# Altium PCB 606-100870-r02.pcbdoc (part 2 of 2)
Units mm, origin at the board's own origin, x right, y up, seen from the top; angles counter-clockwise.
Board outline 62.5 x 28 mm, 2 copper layers (Top Layer, Bottom Layer), stack 1.471 mm thick; 13 components, 5 nets, 34 pads, 13 vias.
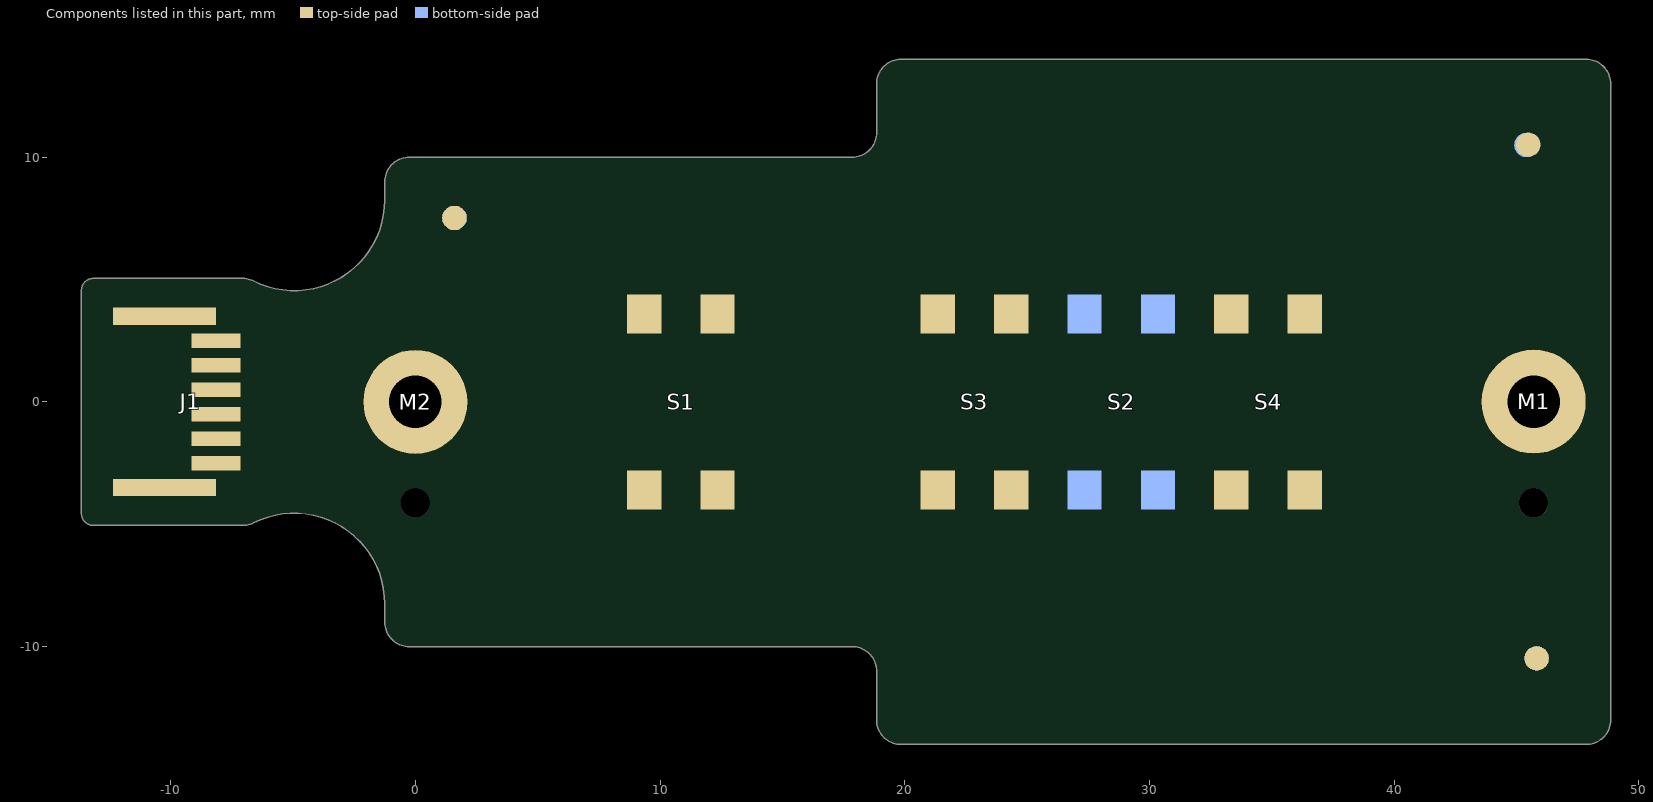
[diagram p2: the components of this part, seen from the top]

## Silkscreen, mask and mechanical layers (free items; w line width, h text height) (continued)
DXF_BOT:
  circle w0.013: c28.85,0 r1.25
  circle w0.013: c0,0 r1.075
  circle w0.013: c0,4.125 r0.6
  circle w0.013: c45.7,4.125 r0.6
  circle w0.013: c45.7,0 r1.075
  circle w0.013: c137.535,62.135 r1.075
  circle w0.013: c137.535,58.01 r0.6
  circle w0.013: c183.235,58.01 r0.6
  circle w0.013: c183.235,62.135 r1.075
  circle w0.013: c154.385,62.135 r1.25
  circle w0.013: c78.129,61.143 r2.25
  circle w0.013: c32.429,57.018 r0.6
  circle w0.013: c78.129,57.018 r0.6
  circle w0.013: c32.429,61.143 r2.25
  circle w0.013: c78.129,61.143 r1.075
  circle w0.013: c32.429,61.143 r1.075
  circle w0.013: c-71.193,56.834 r1.075
  circle w0.013: c-71.193,52.709 r0.6
  circle w0.013: c-25.493,52.709 r0.6
  circle w0.013: c-25.493,56.834 r1.075
  lines w0.013: 29.279,51.143 60.279,51.143 ; 29.279,51.143 29.279,71.143 ; 29.279,51.143 29.279,48.143 ccw(c30.279,48.143) 30.279,47.143 58.279,47.143 ccw(c58.279,48.143) 59.279,48.143 59.279,50.143 cw(c60.279,50.143) 60.279,51.143 ; 29.279,71.143 60.279,71.143 ; 29.279,71.143 29.279,74.143 cw(c30.279,74.143) 30.279,75.143 58.279,75.143 cw(c58.279,74.143) 59.279,74.143 59.279,72.143 ccw(c60.279,72.143) 60.279,71.143 ; 60.279,51.143 78.379,51.143 ccw(c78.379,52.143) 79.379,52.143 79.379,52.893 cw(c83.079,52.893) 84.74,56.2 ccw(c85.189,57.093) 85.189,56.093 91.279,56.093 ccw(c91.279,56.593) 91.779,56.593 91.779,65.693 ccw(c91.279,65.693) 91.279,66.193 85.189,66.193 ccw(c85.189,65.193) 84.74,66.087 cw(c83.079,69.393) 79.379,69.393 79.379,70.143 ccw(c78.379,70.143) 78.379,71.143 60.279,71.143 ; -74.343,43.834 ccw(c-73.343,43.834) -73.343,42.834 -45.343,42.834 ccw(c-45.343,43.834) -44.343,43.834 -44.343,45.834 cw(c-43.343,45.834) -43.343,46.834 -25.243,46.834 ccw(c-25.243,47.834) -24.243,47.834 -24.243,48.584 cw(c-20.543,48.584) -18.882,51.89 ccw(c-18.433,52.784) -18.433,51.784 -12.343,51.784 ccw(c-12.343,52.284) -11.843,52.284 -11.843,61.384 ccw(c-12.343,61.384) -12.343,61.884 -18.433,61.884 ccw(c-18.433,60.884) -18.882,61.778 cw(c-20.543,65.084) -24.243,65.084 -24.243,65.834 ccw(c-25.243,65.834) -25.243,66.834 -43.343,66.834 cw(c-43.343,67.834) -44.343,67.834 -44.343,69.834 ccw(c-45.343,69.834) -45.343,70.834 -73.343,70.834 ccw(c-73.343,69.834) -74.343,69.834 -74.343,43.834 ; -13.65,-4.55 ccw(c-13.15,-4.55) -13.15,-5.05 -7.06,-5.05 ccw(c-7.06,-4.05) -6.611,-4.944 cw(c-4.95,-8.25) -1.25,-8.25 -1.25,-9 ccw(c-0.25,-9) -0.25,-10 17.85,-10 cw(c17.85,-11) 18.85,-11 18.85,-13 ccw(c19.85,-13) 19.85,-14 47.85,-14 ccw(c47.85,-13) 48.85,-13 48.85,13 ccw(c47.85,13) 47.85,14 19.85,14 ccw(c19.85,13) 18.85,13 18.85,11 cw(c17.85,11) 17.85,10 -0.25,10 ccw(c-0.25,9) -1.25,9 -1.25,8.25 cw(c-4.95,8.25) -6.611,4.944 ccw(c-7.06,4.05) -7.06,5.05 -13.15,5.05 ccw(c-13.15,4.55) -13.65,4.55 -13.65,-4.55 ; 26.6,-2.25 31.1,-2.25 31.1,2.25 26.6,2.25 26.6,-2.25 ; 134.385,49.135 ccw(c135.385,49.135) 135.385,48.135 163.385,48.135 ccw(c163.385,49.135) 164.385,49.135 164.385,51.135 cw(c165.385,51.135) 165.385,52.135 183.485,52.135 ccw(c183.485,53.135) 184.485,53.135 184.485,53.885 cw(c188.185,53.885) 189.846,57.191 ccw(c190.295,58.085) 190.295,57.085 196.385,57.085 ccw(c196.385,57.585) 196.885,57.585 196.885,66.685 ccw(c196.385,66.685) 196.385,67.185 190.295,67.185 ccw(c190.295,66.185) 189.846,67.079 cw(c188.185,70.385) 184.485,70.385 184.485,71.135 ccw(c183.485,71.135) 183.485,72.135 165.385,72.135 cw(c165.385,73.135) 164.385,73.135 164.385,75.135 ccw(c163.385,75.135) 163.385,76.135 135.385,76.135 ccw(c135.385,75.135) 134.385,75.135 134.385,49.135 ; 152.135,59.885 152.135,64.385 156.635,64.385 156.635,59.885 152.135,59.885
  text "SECONDARY" at -125.28,54.713 h3.17
DXF_JULY21_TOP:
  drawing of 175 lines, arcs and shapes, not listed
  text "BOARD OUTLINE" at 5.94,273.873 h3.17
  text "KEEP WITHIN/KEEP OUT" at 101.064,273.873 h3.17
  text "COMPONENT PLACEMENT" at 204.36,273.873 h3.17
  text "PRIMARY" at -57.046,229.545 h3.17
DXF_JULY21_BOT:
  circle w0.013: c41.907,169.834 r1.075
  circle w0.013: c41.907,165.709 r0.6
  circle w0.013: c-3.793,165.709 r0.6
  circle w0.013: c-3.793,169.834 r1.075
  circle w0.013: c99.829,174.143 r1.075
  circle w0.013: c145.529,174.143 r1.075
  circle w0.013: c99.829,174.143 r2.25
  circle w0.013: c145.529,170.018 r0.6
  circle w0.013: c99.829,170.018 r0.6
  circle w0.013: c145.529,174.143 r2.25
  circle w0.013: c221.785,175.135 r1.25
  circle w0.013: c250.635,175.135 r1.075
  circle w0.013: c250.635,171.01 r0.6
  circle w0.013: c204.935,171.01 r0.6
  circle w0.013: c204.935,175.135 r1.075
  circle w0.013: c45.7,0 r1.075
  circle w0.013: c45.7,4.125 r0.6
  circle w0.013: c0,4.125 r0.6
  circle w0.013: c0,0 r1.075
  circle w0.013: c28.85,0 r1.25
  lines w0.013: 96.679,164.143 96.679,161.143 ccw(c97.679,161.143) 97.679,160.143 125.679,160.143 ccw(c125.679,161.143) 126.679,161.143 126.679,163.143 cw(c127.679,163.143) 127.679,164.143 ; 96.679,164.143 96.679,184.143 ; 96.679,164.143 127.679,164.143 ; 96.679,184.143 96.679,187.143 cw(c97.679,187.143) 97.679,188.143 125.679,188.143 cw(c125.679,187.143) 126.679,187.143 126.679,185.143 ccw(c127.679,185.143) 127.679,184.143 ; 96.679,184.143 127.679,184.143 ; 127.679,164.143 145.779,164.143 ccw(c145.779,165.143) 146.779,165.143 146.779,165.893 cw(c150.479,165.893) 152.14,169.2 ccw(c152.589,170.093) 152.589,169.093 158.679,169.093 ccw(c158.679,169.593) 159.179,169.593 159.179,178.693 ccw(c158.679,178.693) 158.679,179.193 152.589,179.193 ccw(c152.589,178.193) 152.14,179.087 cw(c150.479,182.393) 146.779,182.393 146.779,183.143 ccw(c145.779,183.143) 145.779,184.143 127.679,184.143 ; -13.65,-4.55 ccw(c-13.15,-4.55) -13.15,-5.05 -7.06,-5.05 ccw(c-7.06,-4.05) -6.611,-4.944 cw(c-4.95,-8.25) -1.25,-8.25 -1.25,-9 ccw(c-0.25,-9) -0.25,-10 17.85,-10 cw(c17.85,-11) 18.85,-11 18.85,-13 ccw(c19.85,-13) 19.85,-14 47.85,-14 ccw(c47.85,-13) 48.85,-13 48.85,13 ccw(c47.85,13) 47.85,14 19.85,14 ccw(c19.85,13) 18.85,13 18.85,11 cw(c17.85,11) 17.85,10 -0.25,10 ccw(c-0.25,9) -1.25,9 -1.25,8.25 cw(c-4.95,8.25) -6.611,4.944 ccw(c-7.06,4.05) -7.06,5.05 -13.15,5.05 ccw(c-13.15,4.55) -13.65,4.55 -13.65,-4.55 ; -6.943,156.834 ccw(c-5.943,156.834) -5.943,155.834 22.057,155.834 ccw(c22.057,156.834) 23.057,156.834 23.057,158.834 cw(c24.057,158.834) 24.057,159.834 42.157,159.834 ccw(c42.157,160.834) 43.157,160.834 43.157,161.584 cw(c46.857,161.584) 48.518,164.89 ccw(c48.966,165.784) 48.966,164.784 55.057,164.784 ccw(c55.057,165.284) 55.557,165.284 55.557,174.384 ccw(c55.057,174.384) 55.057,174.884 48.966,174.884 ccw(c48.966,173.884) 48.518,174.778 cw(c46.857,178.084) 43.157,178.084 43.157,178.834 ccw(c42.157,178.834) 42.157,179.834 24.057,179.834 cw(c24.057,180.834) 23.057,180.834 23.057,182.834 ccw(c22.057,182.834) 22.057,183.834 -5.943,183.834 ccw(c-5.943,182.834) -6.943,182.834 -6.943,156.834 ; 26.6,-2.25 26.6,2.25 31.1,2.25 31.1,-2.25 26.6,-2.25 ; 201.785,162.135 ccw(c202.785,162.135) 202.785,161.135 230.785,161.135 ccw(c230.785,162.135) 231.785,162.135 231.785,164.135 cw(c232.785,164.135) 232.785,165.135 250.885,165.135 ccw(c250.885,166.135) 251.885,166.135 251.885,166.885 cw(c255.585,166.885) 257.246,170.191 ccw(c257.695,171.085) 257.695,170.085 263.785,170.085 ccw(c263.785,170.585) 264.285,170.585 264.285,179.685 ccw(c263.785,179.685) 263.785,180.185 257.695,180.185 ccw(c257.695,179.185) 257.246,180.079 cw(c255.585,183.385) 251.885,183.385 251.885,184.135 ccw(c250.885,184.135) 250.885,185.135 232.785,185.135 cw(c232.785,186.135) 231.785,186.135 231.785,188.135 ccw(c230.785,188.135) 230.785,189.135 202.785,189.135 ccw(c202.785,188.135) 201.785,188.135 201.785,162.135 ; 219.535,172.885 224.035,172.885 224.035,177.385 219.535,177.385 219.535,172.885
  text "SECONDARY" at -57.28,167.713 h3.17
Drill Drawing:
  circle w0.254: c111.787,-10.007 r0.847
  lines w0.254: 110.94,-18.473 112.633,-18.473 112.633,-16.78 110.94,-16.78 110.94,-18.473 ; 110.94,-14.24 111.363,-14.24 111.787,-14.663 112.21,-14.24 112.633,-14.24 112.21,-13.817 112.633,-13.393 112.21,-13.393 111.787,-12.97 111.363,-13.393 110.94,-13.393 111.363,-13.817 110.94,-14.24
  lines w0.381: 109.421,-19.616 315.715,-19.616 ; 109.421,-8.186 315.715,-8.186 ; 123.414,-23.426 123.414,-4.376 ; 136.872,-23.426 136.872,-4.376 ; 164.55,-23.426 164.55,-4.376 ; 177.399,-23.426 177.399,-4.376 ; 196.038,-23.426 196.038,-4.376 ; 234.127,-23.426 234.127,-4.376 ; 249.109,-23.426 249.109,-4.376 ; 268.052,-23.426 268.052,-4.376 ; 287.097,-23.426 287.097,-4.376 ; 109.421,-23.426 315.715,-23.426 315.715,-4.376 109.421,-4.376 109.421,-23.426
  text "Symbol" at 111.707,-7.043 h1.83
  text "Count" at 124.557,-7.043 h1.83
  text "Hole Size" at 138.015,-7.043 h1.83
  text "Plated" at 165.693,-7.043 h1.83
  text "Hole Type" at 178.542,-7.043 h1.83
  text "Drill Layer Pair" at 197.181,-7.043 h1.83
  text "Via/Pad" at 235.27,-7.043 h1.83
  text "Pad Shape" at 250.252,-7.043 h1.83
  text "Template" at 269.195,-7.043 h1.83
  text "Hole Tolerance" at 288.24,-7.043 h1.83
  text "13" at 124.557,-10.853 h1.52
  text "0.250mm (9.84mil)" at 138.015,-10.853 h1.52
  text "PTH" at 165.693,-10.853 h1.52
  text "Round" at 178.542,-10.853 h1.52
  text "Top Layer - Bottom Layer" at 197.181,-10.853 h1.52
  text "Via" at 235.27,-10.853 h1.52
  text "Rounded" at 250.252,-10.853 h1.52
  text "v50h25m0mx0" at 269.195,-10.853 h1.52
  text "2" at 124.557,-14.663 h1.52
  text "1.200mm (47.24mil)" at 138.015,-14.663 h1.52
  text "NPTH" at 165.693,-14.663 h1.52
  text "Round" at 178.542,-14.663 h1.52
  text "Top Layer - Bottom Layer" at 197.181,-14.663 h1.52
  text "Pad" at 235.27,-14.663 h1.52
  text "Rounded" at 250.252,-14.663 h1.52
  text "c120hn120" at 269.195,-14.663 h1.52
  text "2" at 124.557,-18.473 h1.52
  text "2.150mm (84.65mil)" at 138.015,-18.473 h1.52
  text "PTH" at 165.693,-18.473 h1.52
  text "Round" at 178.542,-18.473 h1.52
  text "Top Layer - Bottom Layer" at 197.181,-18.473 h1.52
  text "Pad" at 235.27,-18.473 h1.52
  text "Rounded" at 250.252,-18.473 h1.52
  text "c425h215" at 269.195,-18.473 h1.52
  text "17 Total" at 124.557,-22.283 h1.52
  text ".Layer_Name" at 9.431,-27.042 h3.81

## Text inside footprints (layer, text, board x,y; h text height)
M1: Mechanical 18 "1" at 43.929,0.011 h0.64
M2: Mechanical 18 "1" at -1.778,0 h0.64